# EAGLE board com_board (EAGLE 9.6.2)
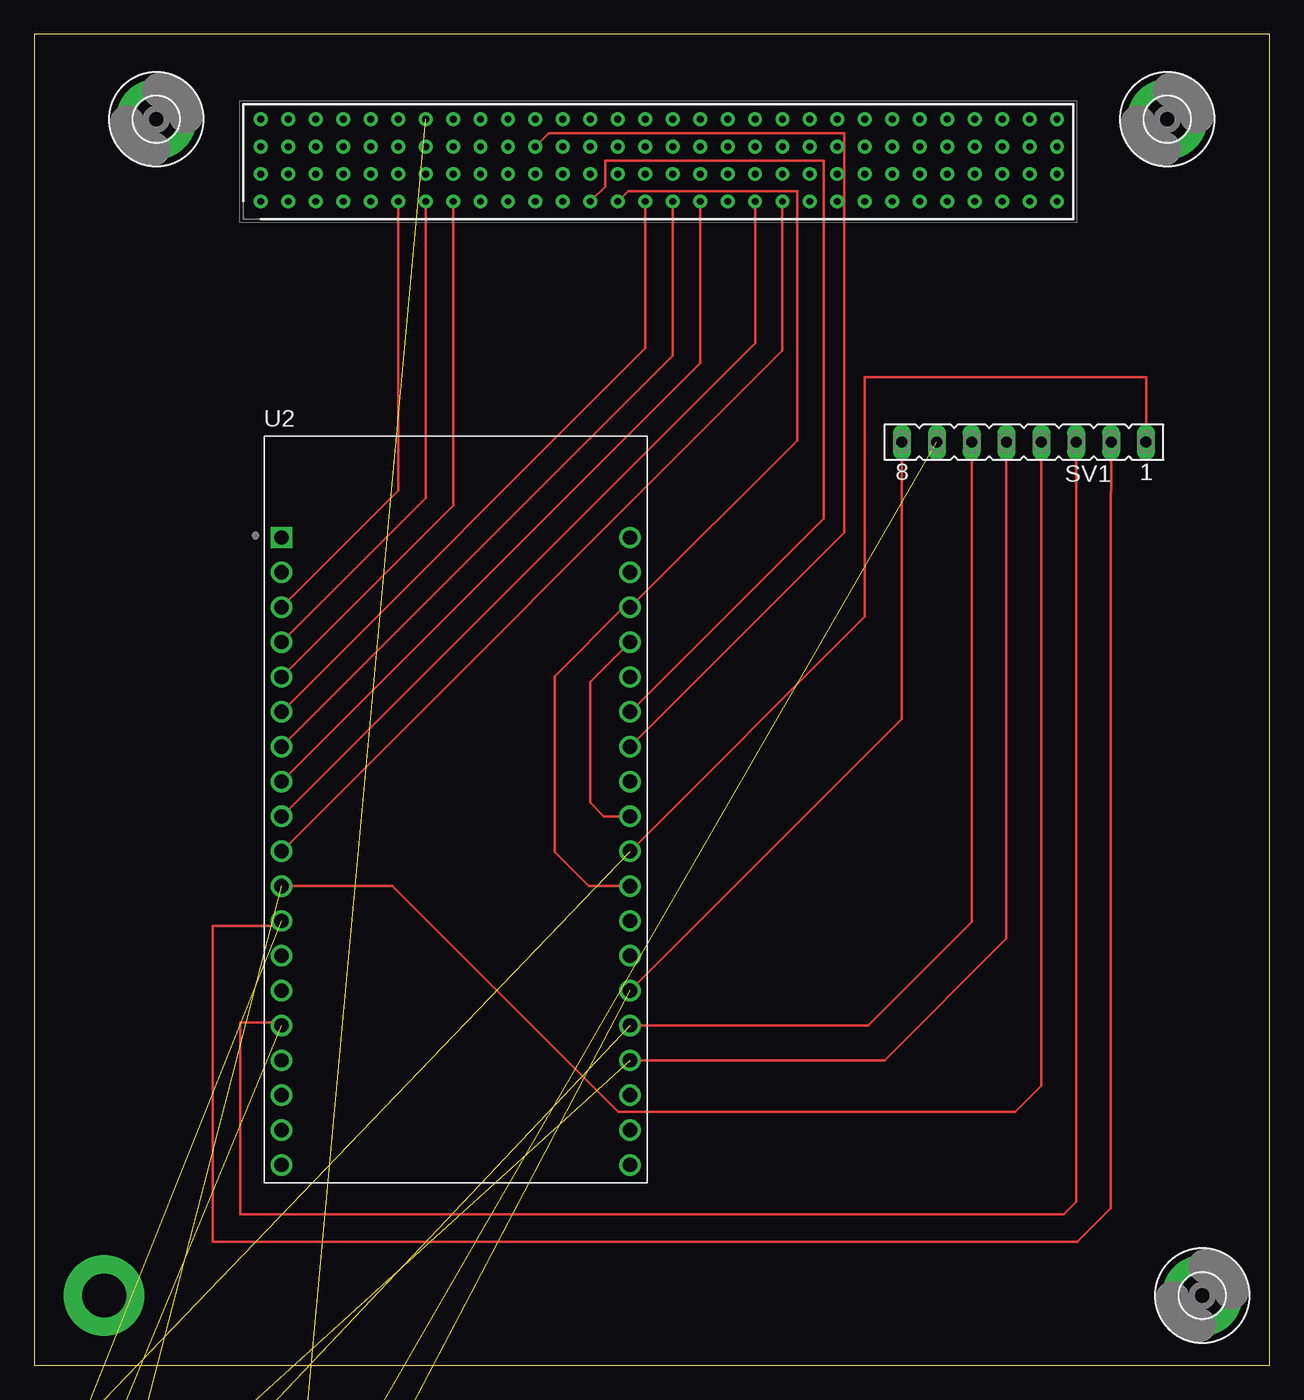
[diagram p0: board, top side]
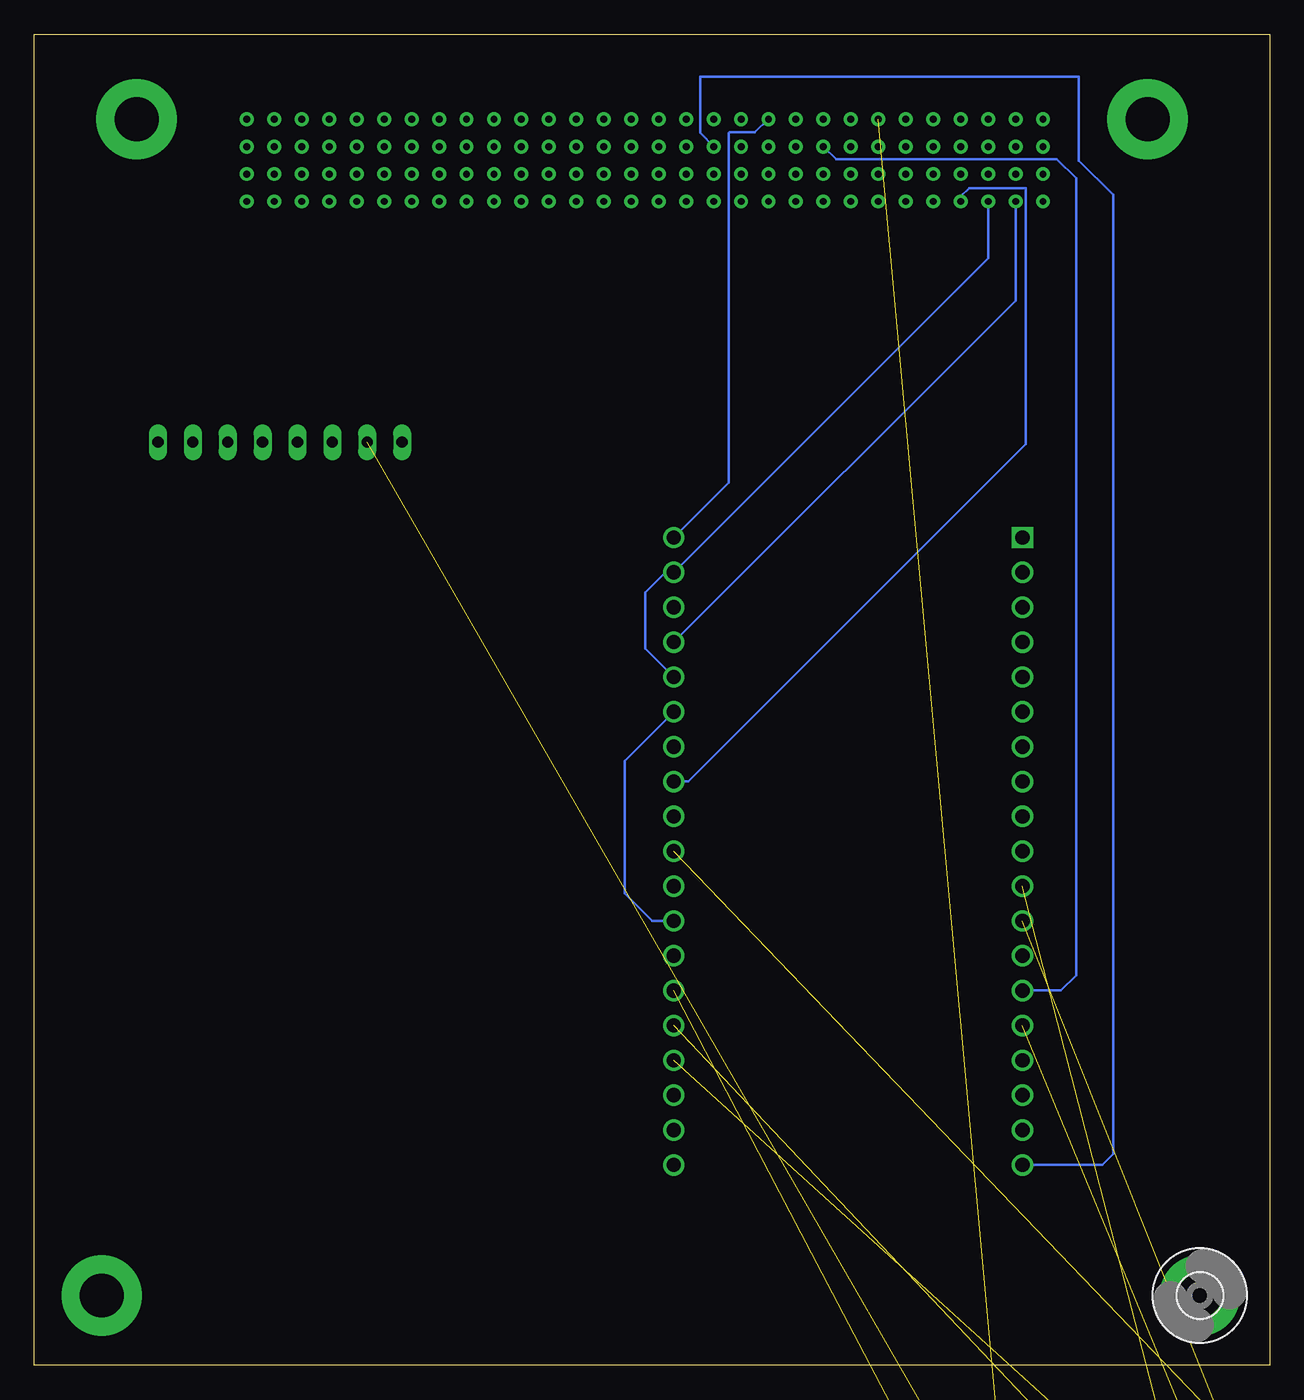
[diagram p1: board, bottom side, seen from below]

Size 90 x 97 mm. Coordinates in mm from the lower left corner, seen from the top.
Outline: 0,0 90,0 90,97 0,97 0,0
Copper layers (1*16): Top 0.035mm / dielectric 1.5mm / Bottom 0.035mm
Design rules "default": minimum track width 6mil, minimum drill 0.35mm, track to track 6mil, track to pad 6mil, pad to pad 6mil, via to via 6mil, smd to smd 6mil, copper to edge 40mil, drill to drill 6mil, minimum pad ring 10mil, minimum via ring 8mil, stop-mask expansion 4mil, vias tented up to drill 0mil, thermal gap 10mil

## Footprints (pad centres in the part's own frame; a part is rotated, then mirrored left to right if it is on the bottom)
3,2-PAD = drill 3.2 pad 5.842: B3,2 0,0
RHDR120W55P200_4X30_6020X820X9 = drill 0.505 pad 0.9: P$1 0,6; P$2 2,6; P$3 4,6; P$4 6,6; P$5 8,6; P$6 10,6; P$7 12,6; P$8 14,6; P$9 16,6; P$10 18,6; P$11 20,6; P$12 22,6; P$13 24,6; P$14 26,6; P$15 28,6; P$16 30,6; P$17 32,6; P$18 34,6; P$19 36,6; P$20 38,6; P$21 40,6; P$22 42,6; P$23 44,6; P$24 46,6; P$25 48,6; P$26 50,6; P$27 52,6; P$28 54,6; P$29 56,6; P$30 58,6; P$31 0,4; P$32 2,4; P$33 4,4; P$34 6,4; P$35 8,4; P$36 10,4; P$37 12,4; P$38 14,4; P$39 16,4; P$40 18,4; P$41 20,4; P$42 22,4; P$43 24,4; P$44 26,4; P$45 28,4; P$46 30,4; P$47 32,4; P$48 34,4; P$49 36,4; P$50 38,4; P$51 40,4; P$52 42,4; P$53 44,4; P$54 46,4; P$55 48,4; P$56 50,4; P$57 52,4; P$58 54,4; P$59 56,4; P$60 58,4; P$61 0,2; P$62 2,2; P$63 4,2; P$64 6,2; P$65 8,2; P$66 10,2; P$67 12,2; P$68 14,2; P$69 16,2; P$70 18,2; P$71 20,2; P$72 22,2; P$73 24,2; P$74 26,2; P$75 28,2; P$76 30,2; P$77 32,2; P$78 34,2; P$79 36,2; P$80 38,2; P$81 40,2; P$82 42,2; P$83 44,2; P$84 46,2; P$85 48,2; P$86 50,2; P$87 52,2; P$88 54,2; P$89 56,2; P$90 58,2; P$91 0,0; P$92 2,0; P$93 4,0; P$94 6,0; P$95 8,0; P$96 10,0; P$97 12,0; P$98 14,0; P$99 16,0; P$100 18,0; P$101 20,0; P$102 22,0; P$103 24,0; P$104 26,0; P$105 28,0; P$106 30,0; P$107 32,0; P$108 34,0; P$109 36,0; P$110 38,0; P$111 40,0; P$112 42,0; P$113 44,0; P$114 46,0; P$115 48,0; P$116 50,0; P$117 52,0; P$118 54,0; P$119 56,0; P$120 58,0
FE08 = drill 0.813 long: 1 -8.89,0; 2 -6.35,0; 3 -3.81,0; 4 -1.27,0; 5 1.27,0; 6 3.81,0; 7 6.35,0; 8 8.89,0
FE12 = drill 0.813 long: 1 -13.97,0; 2 -11.43,0; 3 -8.89,0; 4 -6.35,0; 5 -3.81,0; 6 -1.27,0; 7 1.27,0; 8 3.81,0; 9 6.35,0; 10 8.89,0; 11 11.43,0; 12 13.97,0
MODULE_ESP32-DEVKITC-32D = drill 1.04 square: 1 -12.7,19.76 | drill 1.04: 2 -12.7,17.22; 3 -12.7,14.68; 4 -12.7,12.14; 5 -12.7,9.6; 6 -12.7,7.06; 7 -12.7,4.52; 8 -12.7,1.98; 9 -12.7,-0.56; 10 -12.7,-3.1; 11 -12.7,-5.64; 12 -12.7,-8.18; 13 -12.7,-10.72; 14 -12.7,-13.26; 15 -12.7,-15.8; 16 -12.7,-18.34; 17 -12.7,-20.88; 18 -12.7,-23.42; 19 -12.7,-25.96; 20 12.7,19.76; 21 12.7,17.22; 22 12.7,14.68; 23 12.7,12.14; 24 12.7,9.6; 25 12.7,7.06; 26 12.7,4.52; 27 12.7,1.98; 28 12.7,-0.56; 29 12.7,-3.1; 30 12.7,-5.64; 31 12.7,-8.18; 32 12.7,-10.72; 33 12.7,-13.26; 34 12.7,-15.8; 35 12.7,-18.34; 36 12.7,-20.88; 37 12.7,-23.42; 38 12.7,-25.96

## Placement (x,y rotation side)
H1  MOUNT-PAD-ROUND3.2  [3,2-PAD]  5.08,5.08 0 bottom
H2  MOUNT-PAD-ROUND3.2  [3,2-PAD]  85.09,5.08 0 top
H3  MOUNT-PAD-ROUND3.2  [3,2-PAD]  8.89,90.81 0 top
H4  MOUNT-PAD-ROUND3.2  [3,2-PAD]  82.55,90.81 0 top
J2  M22-6013005  [RHDR120W55P200_4X30_6020X820X9]  16.51,84.82 0 top
SV1  [FE08]  72.1,67.27 180 top
SV2  [FE12]  10.5,-8.8 0 top  (outside the outline)
U2  ESP32-DEVKITC-32D  [MODULE_ESP32-DEVKITC-32D]  30.71,40.56 0 top

## Library data of the parts
H1-H4 = holes
J2 = M22-6013005; DESCRIPTION: HARWIN - M22-6013005 - PCB Receptacle, Board-to-Board, 2 mm, 4 Rows, 120 Contacts, Through Hole Mount, M22 Series; HEIGHT: 9.65mm; MANUFACTURER_NAME: Harwin; MANUFACTURER_PART_NUMBER: M22-6013005
SV1 SV2 = con-lsta; OC_FARNELL: unknown; OC_NEWARK: unknown
U2 = ESP32-DEVKITC-32D; AVAILABILITY: Warning; DESCRIPTION: - Transceiver; 802.11 b/g/n (Wi-Fi, WiFi, WLAN), Bluetooth® Smart Ready 4.x Dual Mode For Use With ESP-WROOM-32; MF: Espressif Systems; MP: ESP32-DEVKITC-32D; PACKAGE: None; PRICE: None; PURCHASE-URL: https://pricing.snapeda.com/search/part/ESP32-DEVKITC-32D/?ref=eda

## Nets
3V3: J2.P$44
3V31: J2.P$14
3V32: U2.1
5V: J2.P$43 U2.19
5V1: J2.P$13
12V: J2.P$42
12V1: J2.P$12
ADC: J2.P$111
ADC2: U2.32
D2: SV1.1 SV2.2 U2.29
D4: SV1.4 SV2.5 U2.11
D5: U2.13
D18: SV1.3 SV2.4 U2.15
D19: SV1.2 SV2.3 U2.12
D21: SV1.5 SV2.6 U2.35
D22: SV1.6 SV2.7 U2.34
D23: SV1.8 SV2.12 U2.33
DAC1: J2.P$109 U2.9
DAC2: J2.P$110 U2.10
EN: U2.2
GND1: SV1.7 SV2.11
GND2: J2.P$7 SV2.10
GND3: J2.P$39 U2.14
GND4: J2.P$41 U2.26
GND5: J2.P$11 U2.20
GND6: J2.P$45
GND7: J2.P$15
GND8: J2.P$16
GND9: J2.P$54
GND10: J2.P$24
GPIO: J2.P$95
GPIO1: J2.P$96 U2.3
GPIO2: J2.P$97 U2.4
GPIO3: J2.P$98 U2.5
GPIO4: J2.P$105 U2.6
GPIO5: J2.P$106 U2.7
GPIO6: J2.P$107 U2.8
MISO: J2.P$94 U2.27
RX: J2.P$93 U2.21 U2.24
SCL: J2.P$104 U2.22 U2.30
SDA: J2.P$103 U2.25 U2.31
TX: J2.P$92 U2.23 U2.28

## Tracks (layer width: path | path; a pad name or v marks a point on that pad's centre or on a via)
5V
  Bottom 0.2: U2.19 12.2,14.6 11.4,15.4 11.4,85.3 13.9,87.8 13.9,93.9 41.5,93.9 41.5,89.81 J2.P$43
D2  (1 unrouted)
  Top 0.2: U2.29 60.5,54.55 60.5,72 81,72 SV1.1
D4  (1 unrouted)
  Top 0.2: U2.11 26.08,34.92 42.55,18.45 43.18,18.45 44.26,18.45 71.45,18.45 73.37,20.37 SV1.4
D18  (1 unrouted)
  Top 0.2: U2.15 17.77,25 15,25 15,11 75,11 75.91,11.91 SV1.3
D19  (1 unrouted)
  Top 0.2: U2.12 17.63,32 13,32 13,9 76,9 78.43,11.43 78.43,63.66 78.45,63.68 SV1.2
D21  (1 unrouted)
  Top 0.2: U2.35 61.96,22.22 61.95,22.23 70.81,31.11 70.81,65.56 70.83,65.58 SV1.5
D22  (1 unrouted)
  Top 0.2: U2.34 60.75,24.76 68.29,32.3 SV1.6
D23  (1 unrouted)
  Top 0.2: U2.33 63.21,47.1 SV1.8
DAC1
  Top 0.2: U2.9 52.51,74.5 J2.P$109
DAC2
  Top 0.2: U2.10 54.51,73.96 J2.P$110
GND1  (1 unrouted)
GND2  (1 unrouted)
GND3
  Bottom 0.2: U2.14 15.2,27.3 14.1,28.4 14.1,86.5 15.5,87.9 31.59,87.9 J2.P$39
GND4
  Top 0.2: U2.26 59,60.67 59,89.8 37.49,89.8 J2.P$41
GND5
  Bottom 0.2: U2.20 39.4,64.33 39.4,89.8 39.34,89.86 37.5,89.86 36.54,90.82 J2.P$11
GPIO1
  Top 0.2: U2.3 26.51,63.74 J2.P$96
GPIO2
  Top 0.2: U2.4 28.51,63.2 J2.P$97
GPIO3
  Top 0.2: U2.5 30.51,62.66 J2.P$98
GPIO4
  Top 0.2: U2.6 44.51,74.12 J2.P$105
GPIO5
  Top 0.2: U2.7 46.51,73.58 J2.P$106
GPIO6
  Top 0.2: U2.8 48.51,73.04 J2.P$107
MISO
  Bottom 0.2: U2.27 42.36,42.54 17.75,67.15 17.75,85.8 21.9,85.8 22.51,85.19 J2.P$94
RX
  Bottom 0.2: J2.P$93 20.51,80.68 U2.21 44.02,57.78 45.5,56.3 45.5,52.25 U2.24
SCL
  Top 0.2: J2.P$104 43.27,85.58 55.57,85.58 55.57,67.4 U2.22 42.94,55.24 37.9,50.2 37.9,37.4 40.38,34.92 U2.30
SDA
  Top 0.2: U2.25 57.5,61.71 57.5,87.8 41.6,87.8 41.6,85.9 J2.P$103
  Bottom 0.2: U2.31 44.98,32.38 47,34.4 47,44.03 U2.25
TX
  Top 0.2: U2.28 41.5,40 40.5,41 40.5,49.79 U2.23
  Bottom 0.2: U2.23 18.51,77.6 J2.P$92